# Altium PCB encoder_m_layout.PcbDoc
Units mm, origin at the board's own origin, x right, y up, seen from the top; angles counter-clockwise.
Board outline 30 x 30 mm, 2 copper layers (Top Layer, Bottom Layer); 8 components, 7 nets, 36 pads, 5 vias.
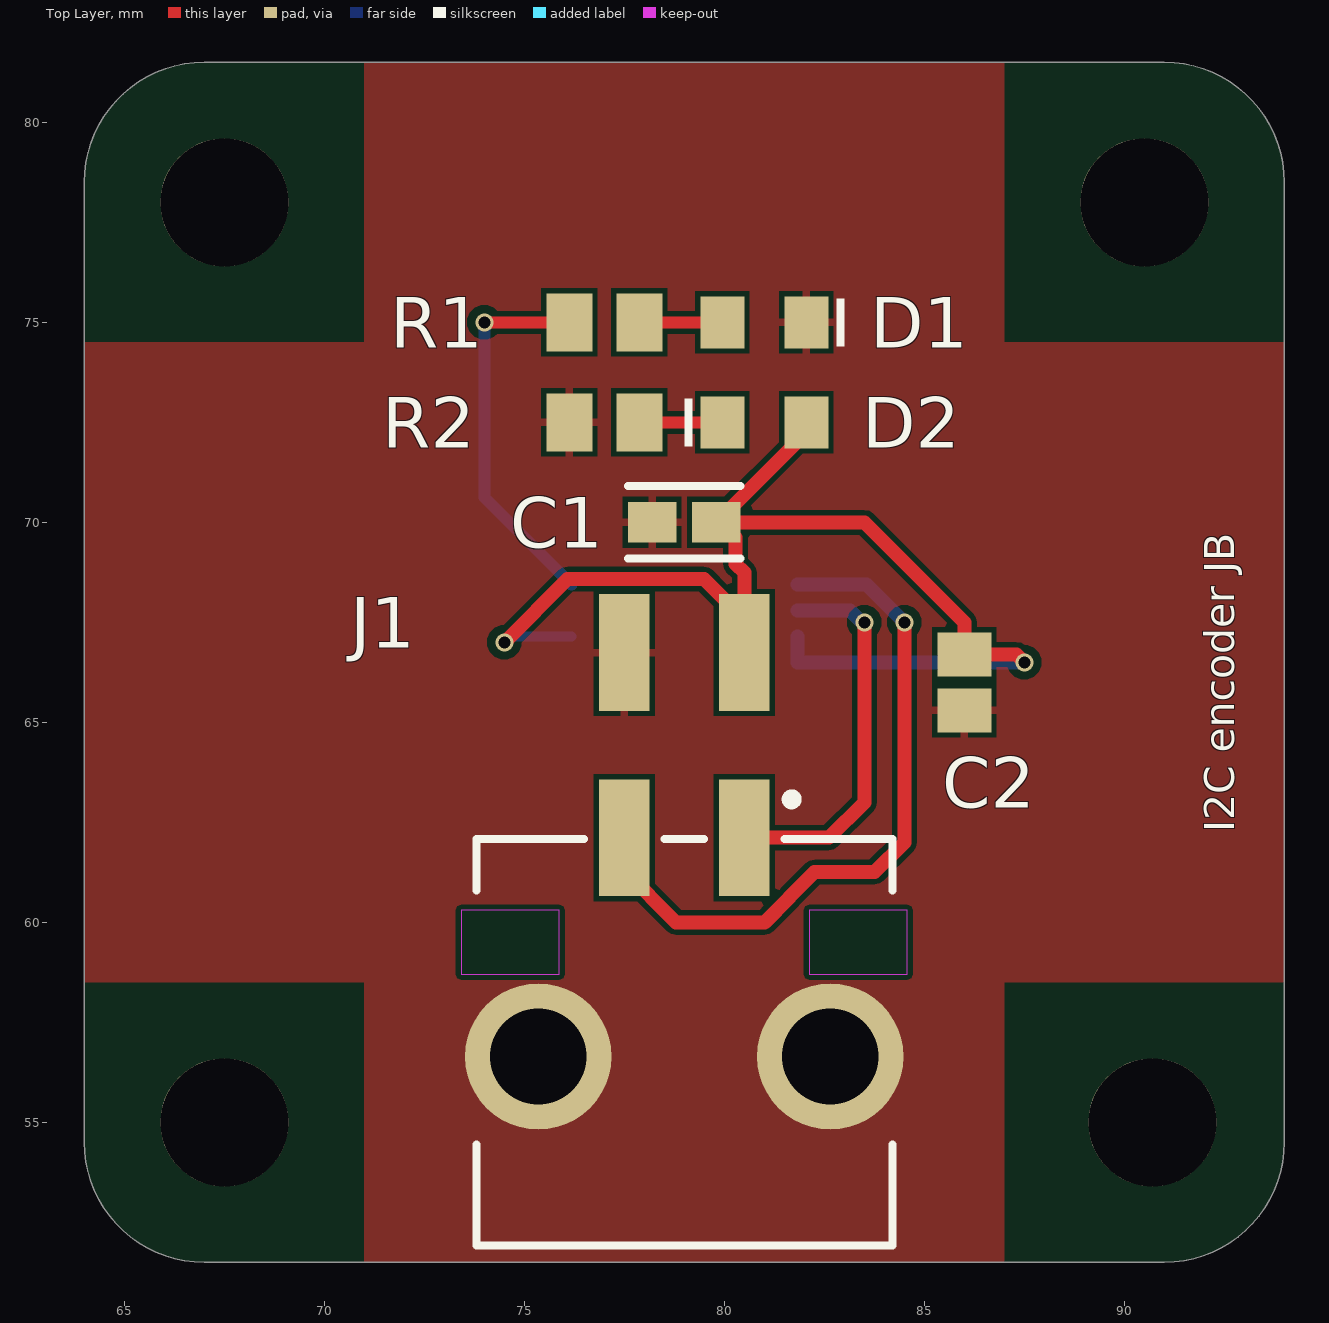
[diagram p0: Top Layer view]
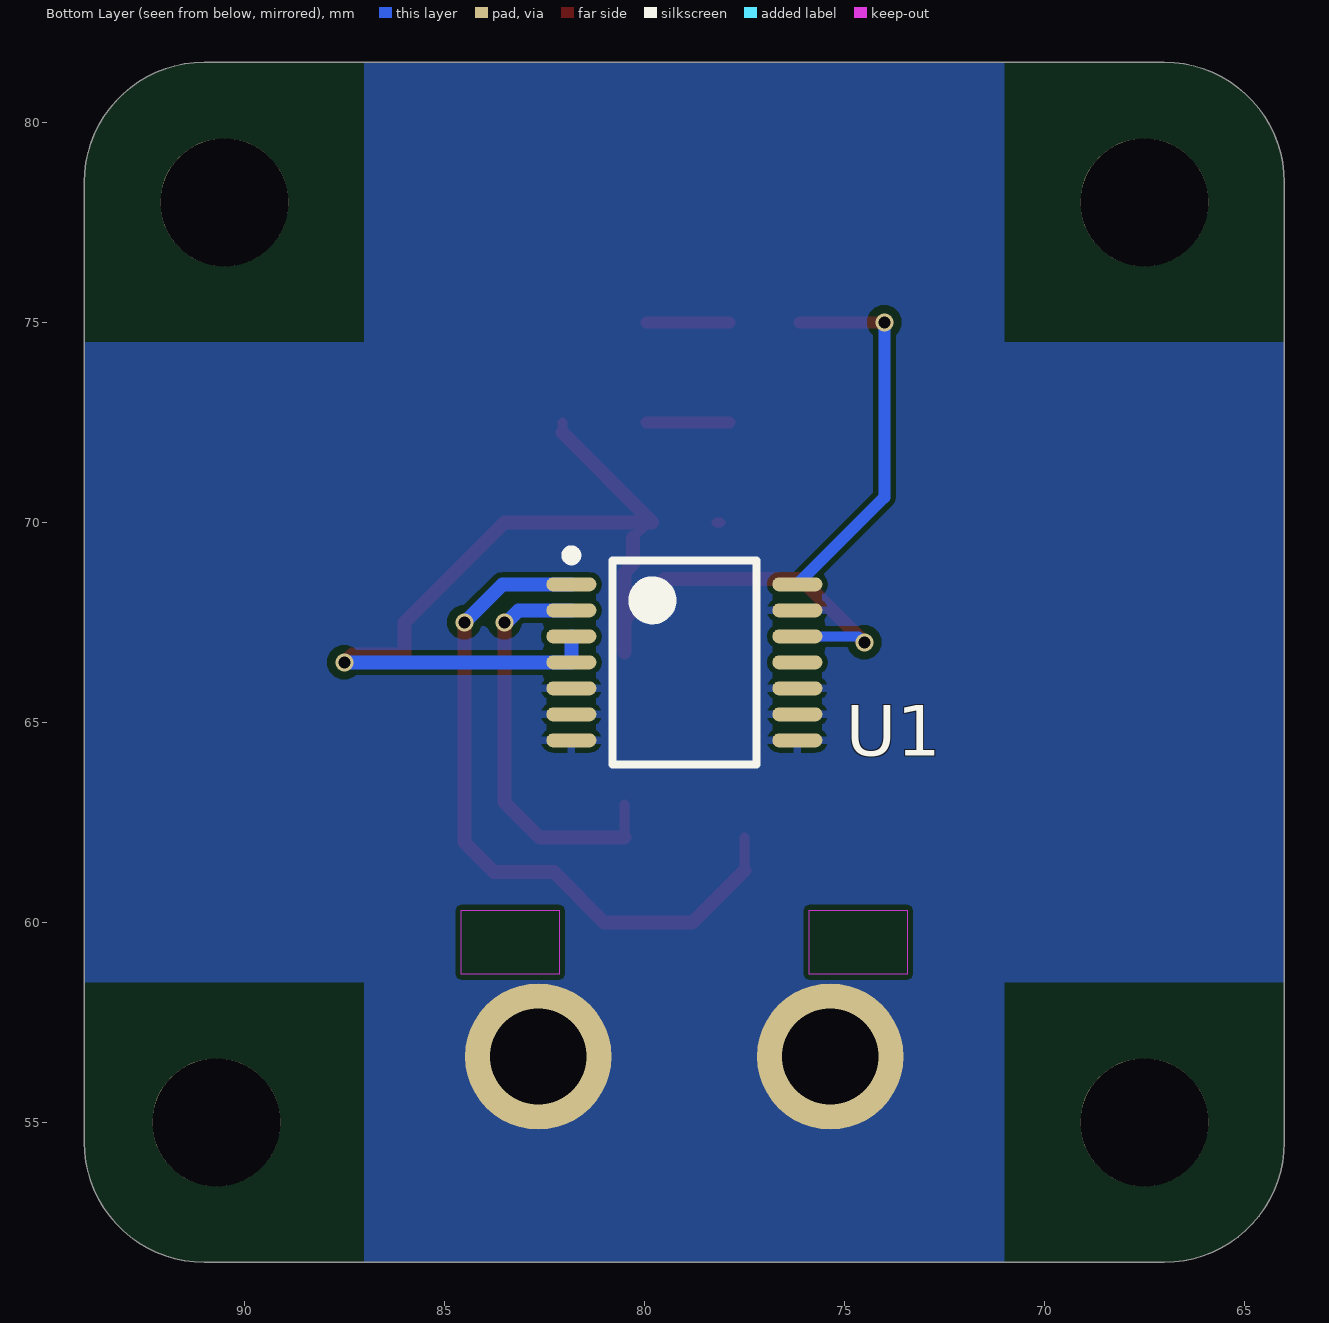
[diagram p1: Bottom Layer view, seen from below]
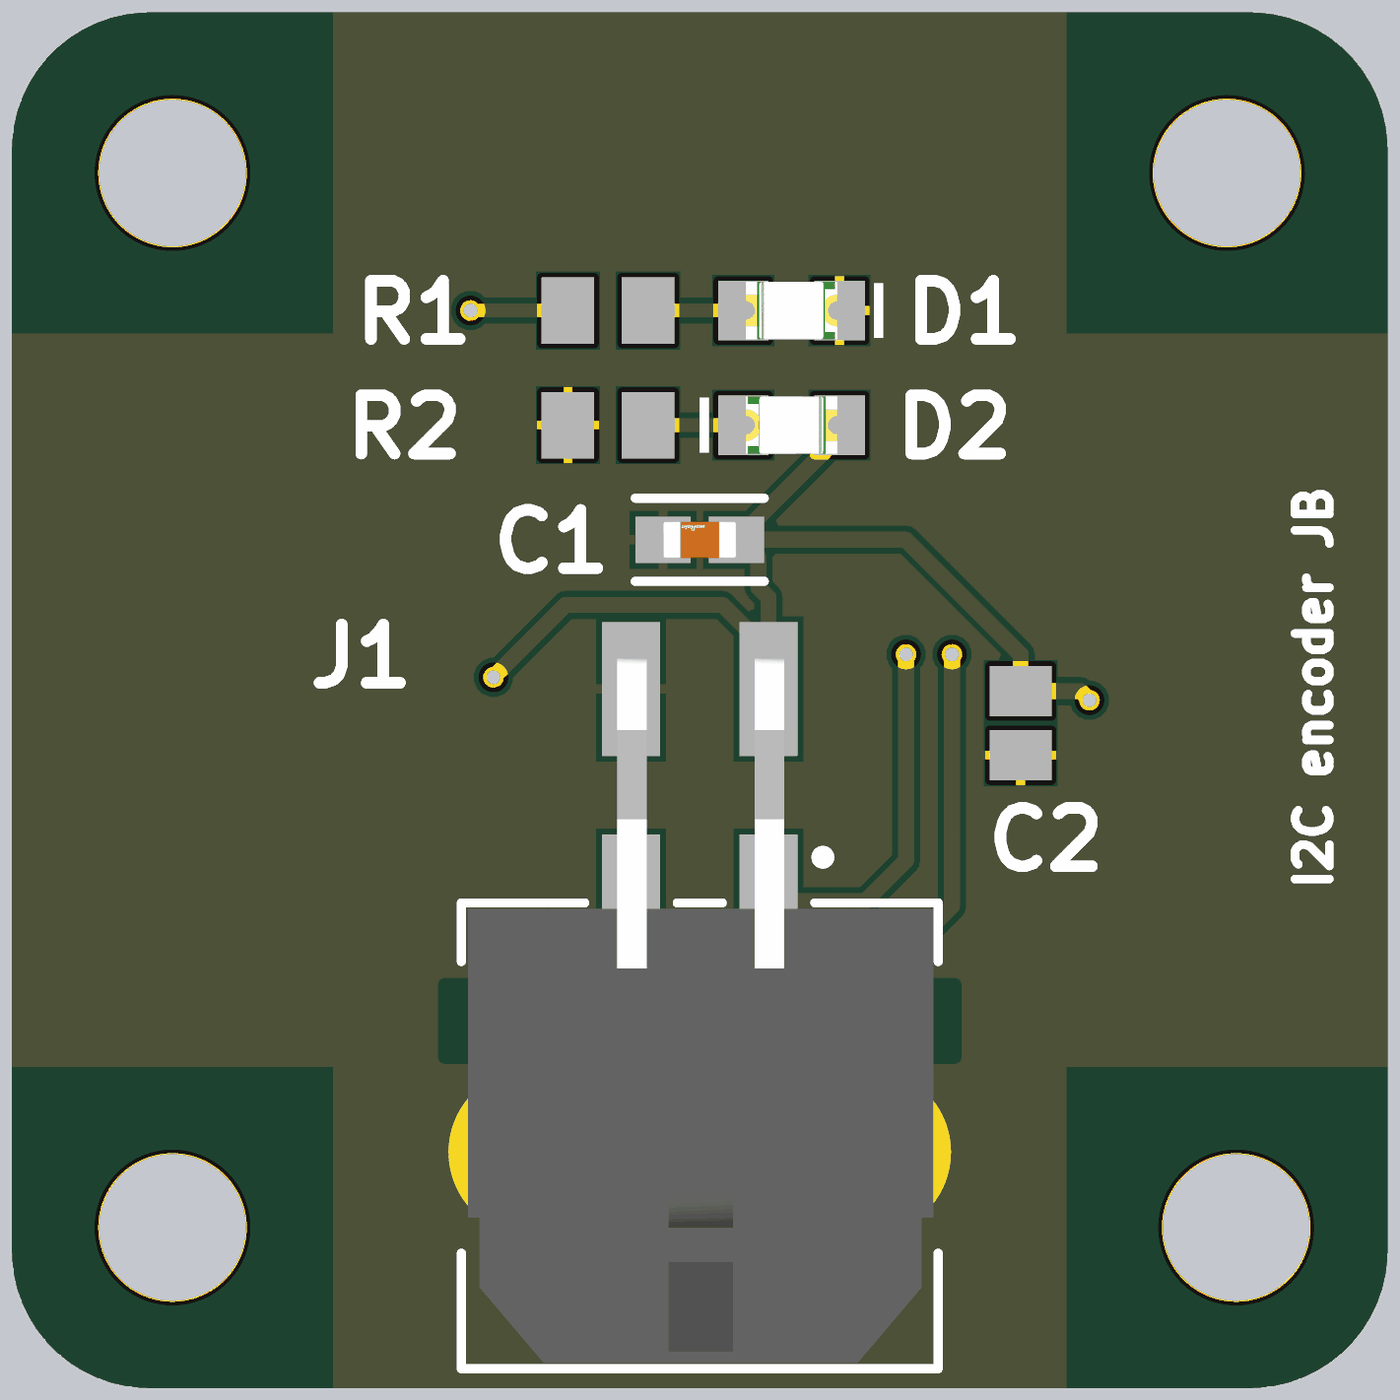
[diagram p2: 3D render of the assembled board from above, using the file's embedded part models]

## Layer stack, top to bottom
Top Solder: solder mask 0.0102, Solder Resist, Dk 3.5
Top Layer: signal copper 0.0356
Dielectric 1: dielectric 0.32, FR-4, Dk 4.8
Bottom Layer: signal copper 0.0356
Bottom Solder: solder mask 0.0102, Solder Resist, Dk 3.5

## Board outline
64,54.5 64,78.5 cw(c67,78.5) 67,81.5 91,81.5 cw(c91,78.5) 94,78.5 94,54.5 cw(c91,54.5) 91,51.5 67,51.5 cw(c67,54.5)

## Design rules (kind name [scope] priority, off if disabled: settings)
Clearance Clearance_POWER [(InNet('NetC205_2') OR InNet('NETC203_2') OR InNet('NETC206_2') OR InNet('NetP410_1') OR InNet('NetP410_3') OR InNet('VM'))] p1: gap=0.254 ignorepadtopadclearanceinfootprint=FALSE except(0: SMDPad-Hole THPad-Hole Via-Hole Fill-Hole Poly-Hole Region-Hole Text-Hole; 0.1: Arc-Arc Arc-Track Track-Track; 0.127: Arc-THPad Arc-Fill Arc-Poly Arc-Region Track-THPad Track-Fill Track-Poly Track-Region SMDPad-SMDPad; 0.2: Arc-SMDPad Track-SMDPad; 0.5: THPad-THPad THPad-Fill THPad-Poly THPad-Region Fill-Fill Fill-Poly Fill-Region Poly-Poly Poly-Region Region-Region)
Clearance [All] p2: gap=0.127 ignorepadtopadclearanceinfootprint=FALSE except(0: SMDPad-Hole THPad-Hole Via-Hole Fill-Hole Poly-Hole Region-Hole Text-Hole; 0.1: Arc-Arc Arc-Track Track-Track; 0.2: Arc-SMDPad Track-SMDPad THPad-Fill THPad-Poly THPad-Region Via-Fill Via-Poly Via-Region; 0.254: Arc-Via Arc-Text Arc-Hole Track-Via Track-Text Track-Hole SMDPad-THPad SMDPad-Via SMDPad-Text THPad-Via THPad-Text Via-Via Via-Text Fill-Text Poly-Text Region-Text Text-Text; 0.5: THPad-THPad)
ComponentClearance [All] p1: gap=0.127 collisioncheckmode=3 verticalgap=0.254 showdistances=FALSE
HoleSize [All] p1: absolutevalues=TRUE maxlimit=6.5 minlimit=0.025 maxpercent=80.000 minpercent=20.000
MinimumSolderMaskSliver [All] p1: minsoldermaskwidth=0.08
PlaneClearance [All] p1: clearance=0.2
PlaneConnect [All] p1: planeconnectstyle=Direct reliefexpansion=0.508 reliefentries=4 reliefconductorwidth=0.254 reliefairgap=0.254
PolygonConnect PolygonConnect_GND_POWER [InNet('GND') vs (HasFootprint('FP-FC-G-MFG') OR HasFootprint('FP-CL32-IPC_B') OR HasFootprint('TSON Advance_TOS') OR HasFootprint('XT60+MR60') OR HasFootprint('XT-60') OR HasFootprint('FP-SMAJ-CA-MFG') OR InNamedPolygon('NONET_L01_P000'))] p1: connectstyle=Direct reliefconductorwidth=0.254 reliefentries=4 polygonreliefangle="90 Angle" airgapwidth=0.254
PolygonConnect PolygonConnect_GND [InNet('GND')] p2: thpad.connectstyle=Direct thpad.reliefconductorwidth=0.254 thpad.reliefentries=4 thpad.polygonreliefangle="90 Angle" thpad.airgapwidth=0.254 smdpad.connectstyle=Relief smdpad.reliefconductorwidth=0.2 smdpad.reliefentries=4 smdpad.polygonreliefangle="90 Angle" smdpad.airgapwidth=0.127 via.connectstyle=Direct via.reliefconductorwidth=0.254 via.reliefentries=4 via.polygonreliefangle="90 Angle" via.airgapwidth=0.254
PolygonConnect [All] p3: connectstyle=Direct reliefconductorwidth=0.254 reliefentries=4 polygonreliefangle="90 Angle" airgapwidth=0.254
RoutingVias [All] p1: holewidth=0.3 width=0.45 viastyle="Through Hole" minholewidth=0.3 minwidth=0.45 maxholewidth=0.55 maxwidth=0.7
SilkToSilkClearance [All] p1: silktosilkclearance=0
SilkToSolderMaskClearance [IsPad] p1: minsilkscreentomaskgap=0.15 clearancetoexposedcopper=TRUE
SolderMaskExpansion [All] p1: expansion=0.1 istentingtop=FALSE
SupplyNets "Schematic Supply Nets_3" [InNet('3V3')] p1: voltage=0.000
SupplyNets "Schematic Supply Nets" [InNet('GND')] p2: voltage=0.000
Width Width_voltage [InNetClass('Voltage')] p1: maxlimit=0.5 minlimit=0.18 preferedwidth=0.18 minimp=50.000000 maximp=50.000000 favimp=50.000000
Width [All] p2: maxlimit=0.5 minlimit=0.127 preferedwidth=0.18 minimp=50.000000 maximp=50.000000 favimp=50.000000
23 further rules are at their usual default settings.

## Components (designator, comment, footprint, x,y, rotation, side; value= is the part's Value field where it differs from the comment)
C1 "10uF" FP-GRM188-0_1-e0_2_0_55-IPC_A 79,70 r180 top
C2 "08055F104KAT2A" CAPC2013X140X50LL20T25 86,66 r90 top
D1 "150080SS75000" WL-SMCW_0805_150080xx75000 81,75 r180 top
D2 "150080SS75000" WL-SMCW_0805_150080xx75000 81,72.5 r0 top
J1 "43045-0406" FP-43045-0406-MFG 79,57 r0 top
R1 "220R" RESC2013X70X40NL20T20 77,75 r180 top
R2 "220R" RESC2013X70X40NL20T20 77,72.5 r0 top
U1 "AS5048B-HTSP" AMS-TSSOP-14-5000X4400DE_L 79,66.5 r180 bottom

## Footprints (in the part's own frame and the unit in brackets; to place one, negate y for a bottom-side part, rotate by r counter-clockwise, add the part's x,y. Pads: shape width x height; smd on the part's side, far side on the other; paste and mask are expansions set on the pad)
AMS-TSSOP-14-5000X4400DE_L [mm] "TSOP, 14-Leads, Body 5.00x4.40mm, Pitch 0.65mm, IPC High Density"
  oval 1.25x0.35 smd: 1(-2.825,1.95) 2(-2.825,1.3) 3(-2.825,0.65) 4(-2.825,0) 5(-2.825,-0.65) 6(-2.825,-1.3) 7(-2.825,-1.95) 8(2.825,-1.95) 9(2.825,-1.3) 10(2.825,-0.65) 11(2.825,0) 12(2.825,0.65) 13(2.825,1.3) 14(2.825,1.95)
  silkscreen extent -2.95,-2.55 1.8,2.8, body extent -2.25,-2.55 2.25,2.55, height 1.2
CAPC2013X140X50LL20T25 [mm] "Chip Capacitor, 2-Leads, Body 2.00x1.25mm, IPC High Density"
  rect 1.1x1.35 smd: 1(-0.7,0) 2(0.7,0)
  body extent -1.1,-0.72 1.1,0.72, height 1.4
FP-43045-0406-MFG [mm]
  rect 1.27x2.92 smd paste+0 mask+0: 1(1.5,5.115) 2(-1.5,5.115) 3(1.5,9.745) 4(-1.5,9.745)
  round 3.66 hole 2.41 paste-2539.97 mask+0: 5(-3.65,-0.355) 6(3.65,-0.355)
  Keep-Out Layer region: -5.575,1.705 -3.125,1.705 -3.125,3.305 -5.575,3.305
  Keep-Out Layer region: 3.125,1.705 5.575,1.705 5.575,3.305 3.125,3.305
  silkscreen extent -5.2,-5.08 5.2,6.2, body extent -5.58,-5.18 5.58,11.3, height 0.25
FP-GRM188-0_1-e0_2_0_55-IPC_A [mm]
  rect 1.208x1.012 smd paste+0 mask+0: 1(-0.802,0) 2(0.802,0)
  silkscreen extent -1.41,-0.91 1.41,0.91, body extent -1.91,-1.01 1.91,1.01, height 0.25
RESC2013X70X40NL20T20 [mm] "Chip Resistor, 2-Leads, Body 2.00x1.25mm, IPC Medium Density"
  rect 1.15x1.45 smd: 1(-0.875,0) 2(0.875,0)
  body extent -1.1,-0.72 1.1,0.72, height 0.7
WL-SMCW_0805_150080xx75000 [mm] "SMD Mono-color Chip LED, body 2.0x1.25mm"
  rect 1.1x1.3 smd: 1(-1.05,0) 2(1.05,0)
  silkscreen extent -2,-0.6 -1.8,0.6, body extent -1,-0.63 1,0.62, height 0.7

## Part data
C1: library part CMP-2006-02792-2, "Chip Multilayer Ceramic Capacitors for General Purpose, 0603, 10uF, X5R, 15%, 20%, 6.3V", Case Code (Imperial)=0603, Case Code (Metric)=1608, Dielectric=X5R, Max Operating Temperature=85°C, Min Operating Temperature=-55°C, Package Quantity=4000, Tolerance=20%, Voltage=6.3V, Capacitance=10uF, Case/Package=0603, Depth=0.8mm, Height=0.8mm, Lead Free="Lead Free", Length=1.6mm, Material=Ceramic, Mount="Surface Mount", Packaging="Tape and Reel", Radiation Hardening=No, REACH SVHC="No SVHC", Termination=SMD/SMT, Thickness=0.035inch, Voltage Rating=6.3V, Voltage Rating (DC)=6.3V, Width=0.031inch
C2: library part CMP-2007-04784-1, Manufacturer="AVX Interconnect / Elco", Part Number=08055F104KAT2A
D1 D2: library part CMP-1426-00010-4, "Led, Red, 630 Nm, 1.9 V, 30 Ma, 60 Mcd Rohs Compliant: Yes", Case Code (Imperial)=0805, Case Code (Metric)=2012, Color=Red, Forward Current=100mA, Forward Voltage=1.9V, Max Junction Temperature (Tj)=95°C, Max Operating Temperature=85°C, Max Reverse Voltage (DC)=5V, Min Operating Temperature=-40°C, Power Dissipation=72mW, Test Current=20mA, Case/Package=0805, Dominant Wavelength=630nm, Height=700µm, Length=2mm, Lens Style="Clear, Rectangular", Luminous Intensity=60mcd, Mount="Surface Mount", Packaging="Tape and Reel", Peak Wavelength=645nm, REACH SVHC=Unknown, Reverse Voltage=5V, RoHS=Compliant, Viewing Angle=140°, Wavelength=630nm, Width=1.25mm
J1: library part CMP-04776-000244-1, "CONN HEADER SMD R/A 4POS 3MM", Case/Package=0406, Color=Black, Contact Resistance=10mR, Current Rating=5A, Flammability Rating="UL94 V-0", Max Operating Temperature=105°C, Max Voltage Rating (DC)=250.25kV, Min Operating Temperature=-40°C, Package Quantity=1800, Voltage Rating=600V, Voltage Rating (DC)=250V, Contact Material=Brass, Contact Plating=Tin, Gender=Male, Glow Wire Compliant=Compliant, Halogen Free="Low Halogen", Housing Material=Thermoplastic, Mount="Surface Mount", Number of Circuits=4, Number of Contacts=4, Number of Positions=4, Number of Rows=2, Orientation="Right Angle", Packaging="Tape and Reel", Pitch=3mm, RoHS Compliant=Yes, Row Spacing=3mm, Series="Micro-Fit 3.0", Termination=SMD/SMT
R1 R2: library part CMP-2001-00044-1, Manufacturer=Panasonic, Part Number=ERJ6ENF2200V
U1: library part CMP-0555-00031-2, "Magnetic Rotary Encoder 14-bit Angular Position Sensor, 3.3 or 5 V, TSSOP-14, Pb-Free, Reel", Manufacturer=AMS, Supply Voltage (V)="3.3 or 5.0", Code_JEDEC=MO-153, ComponentLink1Description="Manufacturer URL", ComponentLink1URL=www.ams.com, ComponentLink2Description=Datasheet, ComponentLink2URL=http://www.ams.com/eng/content/download/438523/1341157/143016, DatasheetVersion="Rev. 1.3", Features="IÂ²C, PWM, In System Programmable", Mounting Technology="Surface Mount", Output="IÂ²C, PWM", PackageDescription="14-Pin Small Outline Package, 5 x 4.4 mm Body, 0.65 mm Pitch", PackageReference=TSSOP-14, PackageVersion="Rev. 2.7, 10/2010", PartNumber=AS5048B-HTSP, Resolution=14-bit

## Free pads (board coordinates)
  round 3.2 hole 3.2: MH(67.5,55) MH1(67.5,78) MH2(90.5,78) MH3(90.7,55)

## Via types
v1: diameter 0.45, hole 0.3, Top Layer to Bottom Layer, 5 vias

## Nets (pads, with @x,y where several pads share a name; then routed paths per layer and width w, separated by ;. In a path a pad name is that pad's centre, name@x,y a point inside that pad or via, vN(x,y) a via of type N, cw(c..) or ccw(c..) an arc to the next point about the centre after c; other vN are vias at no path point)
3V3: C1.1 C2.2 D2.2 J1.3 U1.3 U1.4 U1.12 | length 31.7
  Top Layer w0.25: C1.1@79.9,70 C1.1@80.281,69.619 ; D2.2@82.05,72.248 D2.2
  Top Layer w0.35: v1(74.5,67) 76.08,68.58 79.49,68.58 J1.3@80.5,67.57 ; C1.1@80.281,69.619 80.281,68.959 80.5,68.74 J1.3@80.5,67.57 ; J1.3 J1.3@80.5,67.57 ; D2.2@82.05,72.248 C1.1 83.5,70 86,67.5 C2.2 87.3,66.7 v1(87.5,66.5)
  Bottom Layer w0.25: v1(74.5,67) 74.65,67.15 U1.12
  Bottom Layer w0.35: U1.3 U1.4 v1(87.5,66.5)
GND: C1.2 C2.1 D1.1 J1.4 J1.5 J1.6 R2.1 U1.5 U1.6 U1.7 U1.8 U1.9 U1.10 U1.13 | length 0.1
  Top Layer w0.25: C1.2@78.1,70 C1.2
NetD1_2: D1.2 R1.1 | length 2.1
  Top Layer w0.3: R1.1 D1.2
NetD2_1: D2.1 R2.2 | length 2.1
  Top Layer w0.3: R2.2 D2.1
PWM: R1.2 U1.14 | length 9.6
  Top Layer w0.3: v1(74,75) R1.2
  Bottom Layer w0.3: v1(74,75) 74,70.625 U1.14
SCL: J1.1 U1.2 | length 10.5
  Top Layer w0.25: J1.1 J1.1@80.5,62.94
  Top Layer w0.35: J1.1 82.615,62.115 83.5,63 v1(83.5,67.5)
  Bottom Layer w0.25: v1@83.446,67.5 v1(83.5,67.5)
  Bottom Layer w0.35: U1.2 83.146,67.8 v1@83.446,67.5
SDA: J1.2 U1.1 | length 17.8
  Top Layer w0.25: J1.2@77.5,61.29 77.5,61.5 J1.2
  Top Layer w0.35: J1.2@77.5,61.29 78.79,60 81.01,60 81.633,60.622 81.633,60.633 82.255,61.255 83.755,61.255 84.5,62 v1(84.5,67.5)
  Bottom Layer w0.35: U1.1 83.55,68.45 v1(84.5,67.5)
pads on no net: U1.11

## Polygon pours and split planes (outlines as drawn)
GND on Top Layer "GND_L01_P005" (solid, pour order 5): 94,78.96 ccw(c91.46,78.96) 91.46,81.5 66.54,81.5 ccw(c66.54,78.96) 64,78.96 64,54.04 ccw(c66.54,54.04) 66.54,51.5 91,51.5 ccw(c91,54.5) 94,54.5
GND on Bottom Layer "GND_L02_P010" (solid, pour order 10): 64,51.5 94,51.5 94,81.5 64,81.5

## Other copper
Top Layer:
  pour cut-out: 64,51.5 64,58.5 71,58.5 71,51.5
  pour cut-out: 64,74.5 64,81.5 71,81.5 71,74.5
  pour cut-out: 87,74.5 87,81.5 94,81.5 94,74.5
  pour cut-out: 87,51.5 87,58.5 94,58.5 94,51.5
Bottom Layer:
  pour cut-out: 87,51.5 87,58.5 94,58.5 94,51.5
  pour cut-out: 87,81.5 94,81.5 94,74.5 87,74.5
  pour cut-out: 71,74.5 71,81.5 64,81.5 64,74.5
  pour cut-out: 71,51.5 71,58.5 64,58.5 64,51.5

## Silkscreen, mask and mechanical layers (free items; w line width, h text height)
Top Overlay:
  text "I2C encoder JB" at 92.746,62.254 h0.75 r90
Mechanical 1:
  the board outline again, w0.254

## Dimensions
91,51.5 to 88,58.5 on Mechanical 1
94,54.5 to 87,57 on Mechanical 1
94,78.5 to 90.5,78 on Mechanical 1
91,78.5 to 100,80.5 on Mechanical 1
64,78.5 to 94,78.5 on Mechanical 1
67,81.5 to 67,51.5 on Mechanical 1